# Altium PCB LPCB218R0.PcbDoc (part 3 of 3)
Units mm, origin at the board's own origin, x right, y up, seen from the top; angles counter-clockwise.
Board outline 259.35 x 183.7 mm, 4 copper layers (Top Layer, Internal Plane 1, Mid-Layer 1, Bottom Layer); 193 components, 208 nets, 896 pads, 205 vias.
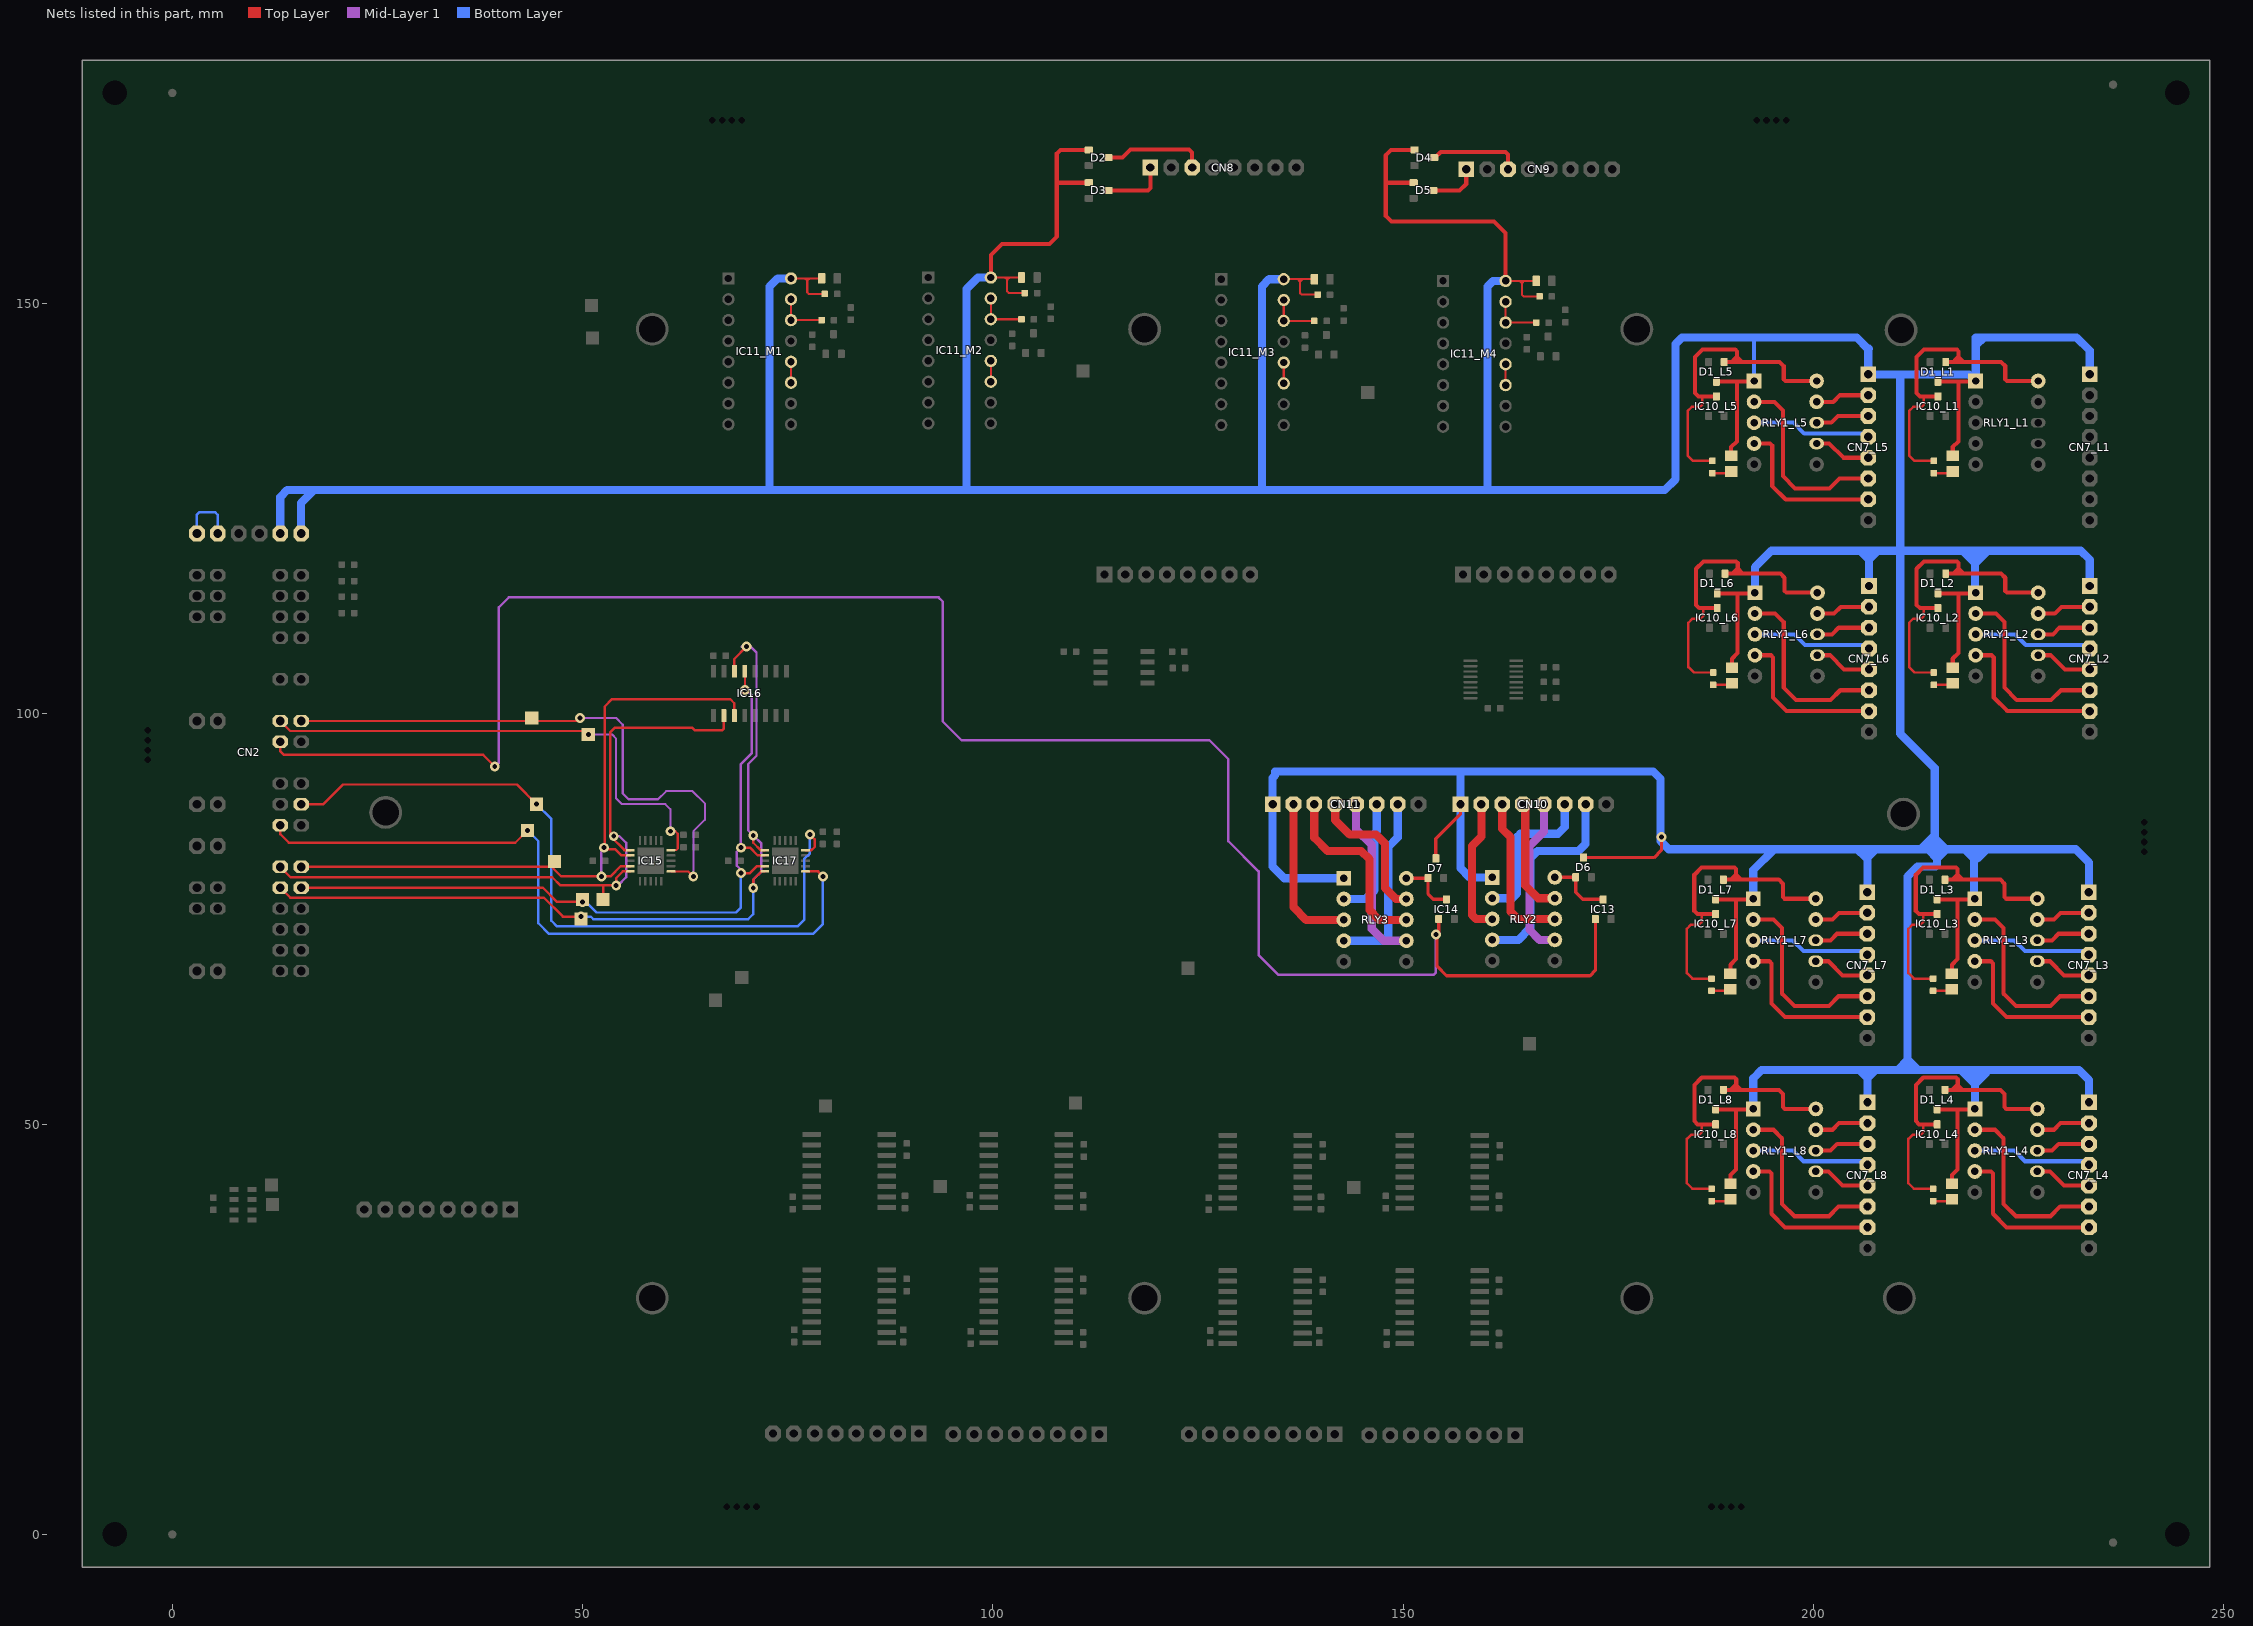
[diagram p5: the nets of this part, all layers, seen from the top]

## Via types
v1: diameter 1.2, hole 0.6, Top Layer to Bottom Layer, 181 vias
v2: diameter 0.5, hole 0.2, Top Layer to Bottom Layer, tented both sides, 16 vias
v3: diameter 1.27, hole 0.711, Top Layer to Bottom Layer, 8 vias

## Nets (pads, with @x,y where several pads share a name; then routed paths per layer and width w, separated by ;. In a path a pad name is that pad's centre, name@x,y a point inside that pad or via, vN(x,y) a via of type N, cw(c..) or ccw(c..) an arc to the next point about the centre after c; other vN are vias at no path point) (continued)
NetCN7_L2_2: CN7_L2.2 RLY1_L2.9 | length 6.6
  Top Layer w0.5: RLY1_L2.9@227.41,112.24 229.44,112.24 230.25,113.05 CN7_L2.2@233.7,113.05
NetCN7_L2_3: CN7_L2.3 RLY1_L2.8 | length 6.6
  Top Layer w0.5: RLY1_L2.8@227.41,109.7 229.2,109.7 230.01,110.51 CN7_L2.3@233.7,110.51
NetCN7_L2_4: CN7_L2.4 RLY1_L2.3 | length 14.6
  Bottom Layer w0.5: RLY1_L2.3@219.79,109.7 224.6,109.7 225.9,108.4 233.27,108.4 CN7_L2.4@233.7,107.97
NetCN7_L2_5: CN7_L2.5 RLY1_L2.7 | length 7
  Top Layer w0.5: RLY1_L2.7@227.41,107.16 228.94,107.16 230.67,105.43 CN7_L2.5@233.7,105.43
NetCN7_L2_6: CN7_L2.6 RLY1_L2.2 | length 23.5
  Top Layer w0.5: RLY1_L2.2@219.79,112.24 222.26,112.24 223.3,111.2 223.3,103.2 224.8,101.7 229,101.7 230.19,102.89 CN7_L2.6@233.7,102.89
NetCN7_L2_7: CN7_L2.7 RLY1_L2.4 | length 19.6
  Top Layer w0.5: RLY1_L2.4@219.79,107.16 221.74,107.16 222,106.9 222,102 223.65,100.35 CN7_L2.7@233.7,100.35
NetCN7_L3_2: CN7_L3.2 RLY1_L3.9 | length 6.6
  Top Layer w0.5: RLY1_L3.9@227.31,74.94 229.34,74.94 230.15,75.75 CN7_L3.2@233.6,75.75
NetCN7_L3_3: CN7_L3.3 RLY1_L3.8 | length 6.6
  Top Layer w0.5: RLY1_L3.8@227.31,72.4 229.1,72.4 229.91,73.21 CN7_L3.3@233.6,73.21
NetCN7_L3_4: CN7_L3.4 RLY1_L3.3 | length 14.6
  Bottom Layer w0.5: RLY1_L3.3@219.69,72.4 224.5,72.4 225.8,71.1 233.17,71.1 CN7_L3.4@233.6,70.67
NetCN7_L3_5: CN7_L3.5 RLY1_L3.7 | length 7
  Top Layer w0.5: RLY1_L3.7@227.31,69.86 228.84,69.86 230.57,68.13 CN7_L3.5@233.6,68.13
NetCN7_L3_6: CN7_L3.6 RLY1_L3.2 | length 23.5
  Top Layer w0.5: RLY1_L3.2@219.69,74.94 222.16,74.94 223.2,73.9 223.2,65.9 224.7,64.4 228.9,64.4 230.09,65.59 CN7_L3.6@233.6,65.59
NetCN7_L3_7: CN7_L3.7 RLY1_L3.4 | length 19.6
  Top Layer w0.5: RLY1_L3.4@219.69,69.86 221.64,69.86 221.9,69.6 221.9,64.7 223.55,63.05 CN7_L3.7@233.6,63.05
NetCN7_L4_2: CN7_L4.2 RLY1_L4.9 | length 6.6
  Top Layer w0.5: RLY1_L4.9@227.32,49.32 229.35,49.32 230.16,50.13 CN7_L4.2@233.61,50.13
NetCN7_L4_3: CN7_L4.3 RLY1_L4.8 | length 6.6
  Top Layer w0.5: RLY1_L4.8@227.32,46.78 229.11,46.78 229.92,47.59 CN7_L4.3@233.61,47.59
NetCN7_L4_4: CN7_L4.4 RLY1_L4.3 | length 14.6
  Bottom Layer w0.5: RLY1_L4.3@219.7,46.78 224.51,46.78 225.81,45.48 233.18,45.48 CN7_L4.4@233.61,45.05
NetCN7_L4_5: CN7_L4.5 RLY1_L4.7 | length 7
  Top Layer w0.5: RLY1_L4.7@227.32,44.24 228.85,44.24 230.58,42.51 CN7_L4.5@233.61,42.51
NetCN7_L4_6: CN7_L4.6 RLY1_L4.2 | length 23.5
  Top Layer w0.5: RLY1_L4.2@219.7,49.32 222.17,49.32 223.21,48.28 223.21,40.28 224.71,38.78 228.91,38.78 230.1,39.97 CN7_L4.6@233.61,39.97
NetCN7_L4_7: CN7_L4.7 RLY1_L4.4 | length 19.6
  Top Layer w0.5: RLY1_L4.4@219.7,44.24 221.65,44.24 221.91,43.98 221.91,39.08 223.56,37.43 CN7_L4.7@233.61,37.43
NetCN7_L5_2: CN7_L5.2 RLY1_L5.9 | length 6.6
  Top Layer w0.5: RLY1_L5.9@200.41,138.04 202.44,138.04 203.25,138.85 CN7_L5.2@206.7,138.85
NetCN7_L5_3: CN7_L5.3 RLY1_L5.8 | length 6.6
  Top Layer w0.5: RLY1_L5.8@200.41,135.5 202.2,135.5 203.01,136.31 CN7_L5.3@206.7,136.31
NetCN7_L5_4: CN7_L5.4 RLY1_L5.3 | length 14.6
  Bottom Layer w0.5: RLY1_L5.3@192.79,135.5 197.6,135.5 198.9,134.2 206.27,134.2 CN7_L5.4@206.7,133.77
NetCN7_L5_5: CN7_L5.5 RLY1_L5.7 | length 7
  Top Layer w0.5: RLY1_L5.7@200.41,132.96 201.94,132.96 203.67,131.23 CN7_L5.5@206.7,131.23
NetCN7_L5_6: CN7_L5.6 RLY1_L5.2 | length 23.5
  Top Layer w0.5: RLY1_L5.2@192.79,138.04 195.26,138.04 196.3,137 196.3,129 197.8,127.5 202,127.5 203.19,128.69 CN7_L5.6@206.7,128.69
NetCN7_L5_7: CN7_L5.7 RLY1_L5.4 | length 19.6
  Top Layer w0.5: RLY1_L5.4@192.79,132.96 194.74,132.96 195,132.7 195,127.8 196.65,126.15 CN7_L5.7@206.7,126.15
NetCN7_L6_2: CN7_L6.2 RLY1_L6.9 | length 6.6
  Top Layer w0.5: RLY1_L6.9@200.51,112.24 202.54,112.24 203.35,113.05 CN7_L6.2@206.8,113.05
NetCN7_L6_3: CN7_L6.3 RLY1_L6.8 | length 6.6
  Top Layer w0.5: RLY1_L6.8@200.51,109.7 202.3,109.7 203.11,110.51 CN7_L6.3@206.8,110.51
NetCN7_L6_4: CN7_L6.4 RLY1_L6.3 | length 14.6
  Bottom Layer w0.5: RLY1_L6.3@192.89,109.7 197.7,109.7 199,108.4 206.37,108.4 CN7_L6.4@206.8,107.97
NetCN7_L6_5: CN7_L6.5 RLY1_L6.7 | length 7
  Top Layer w0.5: RLY1_L6.7@200.51,107.16 202.04,107.16 203.77,105.43 CN7_L6.5@206.8,105.43
NetCN7_L6_6: CN7_L6.6 RLY1_L6.2 | length 23.5
  Top Layer w0.5: RLY1_L6.2@192.89,112.24 195.36,112.24 196.4,111.2 196.4,103.2 197.9,101.7 202.1,101.7 203.29,102.89 CN7_L6.6@206.8,102.89
NetCN7_L6_7: CN7_L6.7 RLY1_L6.4 | length 19.6
  Top Layer w0.5: RLY1_L6.4@192.89,107.16 194.84,107.16 195.1,106.9 195.1,102 196.75,100.35 CN7_L6.7@206.8,100.35
NetCN7_L7_2: CN7_L7.2 RLY1_L7.9 | length 6.6
  Top Layer w0.5: RLY1_L7.9@200.31,74.94 202.34,74.94 203.15,75.75 CN7_L7.2@206.6,75.75
NetCN7_L7_3: CN7_L7.3 RLY1_L7.8 | length 6.6
  Top Layer w0.5: RLY1_L7.8@200.31,72.4 202.1,72.4 202.91,73.21 CN7_L7.3@206.6,73.21
NetCN7_L7_4: CN7_L7.4 RLY1_L7.3 | length 14.6
  Bottom Layer w0.5: RLY1_L7.3@192.69,72.4 197.5,72.4 198.8,71.1 206.17,71.1 CN7_L7.4@206.6,70.67
NetCN7_L7_5: CN7_L7.5 RLY1_L7.7 | length 7
  Top Layer w0.5: RLY1_L7.7@200.31,69.86 201.84,69.86 203.57,68.13 CN7_L7.5@206.6,68.13
NetCN7_L7_6: CN7_L7.6 RLY1_L7.2 | length 23.5
  Top Layer w0.5: RLY1_L7.2@192.69,74.94 195.16,74.94 196.2,73.9 196.2,65.9 197.7,64.4 201.9,64.4 203.09,65.59 CN7_L7.6@206.6,65.59
NetCN7_L7_7: CN7_L7.7 RLY1_L7.4 | length 19.6
  Top Layer w0.5: RLY1_L7.4@192.69,69.86 194.64,69.86 194.9,69.6 194.9,64.7 196.55,63.05 CN7_L7.7@206.6,63.05
NetCN7_L8_2: CN7_L8.2 RLY1_L8.9 | length 6.6
  Top Layer w0.5: RLY1_L8.9@200.32,49.32 202.35,49.32 203.16,50.13 CN7_L8.2@206.61,50.13
NetCN7_L8_3: CN7_L8.3 RLY1_L8.8 | length 6.6
  Top Layer w0.5: RLY1_L8.8@200.32,46.78 202.11,46.78 202.92,47.59 CN7_L8.3@206.61,47.59
NetCN7_L8_4: CN7_L8.4 RLY1_L8.3 | length 14.6
  Bottom Layer w0.5: RLY1_L8.3@192.7,46.78 197.51,46.78 198.81,45.48 206.18,45.48 CN7_L8.4@206.61,45.05
NetCN7_L8_5: CN7_L8.5 RLY1_L8.7 | length 7
  Top Layer w0.5: RLY1_L8.7@200.32,44.24 201.85,44.24 203.58,42.51 CN7_L8.5@206.61,42.51
NetCN7_L8_6: CN7_L8.6 RLY1_L8.2 | length 23.5
  Top Layer w0.5: RLY1_L8.2@192.7,49.32 195.17,49.32 196.21,48.28 196.21,40.28 197.71,38.78 201.91,38.78 203.1,39.97 CN7_L8.6@206.61,39.97
NetCN7_L8_7: CN7_L8.7 RLY1_L8.4 | length 19.6
  Top Layer w0.5: RLY1_L8.4@192.7,44.24 194.65,44.24 194.91,43.98 194.91,39.08 196.56,37.43 CN7_L8.7@206.61,37.43
NetCN8_1: CN8.1 D3.3 | length 7.7
  Top Layer w0.5: D3.3@114.1,163.8 118.9,163.8 119.21,164.11 CN8.1@119.21,166.6
NetCN8_3: CN8.3 D2.3 | length 12.6
  Top Layer w0.5: D2.3@114.1,167.8 115.8,167.8 116.8,168.8 123.9,168.8 124.29,168.41 CN8.3@124.29,166.6
NetCN9_1: CN9.1 D5.3 | length 6.1
  Top Layer w0.5: D5.3@153.7,163.8 156.9,163.8 157.71,164.61 CN9.1@157.71,166.4
NetCN9_3: CN9.3 D4.3 | length 11.1
  Top Layer w0.5: D4.3@153.9,167.8 154.6,168.5 162.5,168.5 162.79,168.21 CN9.3@162.79,166.4
NetCN10_2: CN10.2 RLY2.3 | length 16.7
  Top Layer w1: CN10.2@159.55,89 159.55,85.05 158.4,83.9 158.4,75.5 158.9,75 RLY2.3@160.89,75
NetCN10_3: CN10.3 RLY2.8 | length 19.3
  Top Layer w1: CN10.3@162.09,89 162.09,86.01 163.1,85 163.1,75.9 164,75 RLY2.8@168.51,75
NetCN10_4: CN10.4 RLY2.9 | length 14.3
  Top Layer w1: CN10.4@164.63,89 164.9,88.73 164.9,79.1 166.46,77.54 RLY2.9@168.51,77.54
NetCN10_5: CN10.5 RLY2.7 | length 19.7
  Mid-Layer 1 w1: CN10.5@167.17,89 167.17,85.67 165.4,83.9 165.4,73.7 166.64,72.46 RLY2.7@168.51,72.46
NetCN10_6: CN10.6 RLY2.2 | length 19.2
  Bottom Layer w1: RLY2.2@160.89,77.54 163.34,77.54 163.9,78.1 163.9,85 164.3,85.4 168.9,85.4 169.71,86.21 CN10.6@169.71,89
NetCN10_7: CN10.7 RLY2.4 | length 26
  Bottom Layer w1: RLY2.4@160.89,72.46 164.06,72.46 165.5,73.9 165.5,82.4 166.4,83.3 171.4,83.3 172.25,84.15 CN10.7@172.25,89
NetCN11_2: CN11.2 RLY3.3 | length 19.3
  Top Layer w1: CN11.2@136.65,89 136.65,76.45 138.2,74.9 RLY3.3@142.79,74.9
NetCN11_3: CN11.3 RLY3.8 | length 23.1
  Top Layer w1: CN11.3@139.19,89 139.19,84.91 140.8,83.3 144.9,83.3 145.9,82.3 145.9,76.1 147.1,74.9 RLY3.8@150.41,74.9
NetCN11_4: CN11.4 RLY3.9 | length 17.8
  Top Layer w1: CN11.4@141.73,89 141.73,87.07 143.5,85.3 146.7,85.3 147.8,84.2 147.8,78.8 149.16,77.44 RLY3.9@150.41,77.44
NetCN11_5: CN11.5 RLY3.7 | length 20.8
  Mid-Layer 1 w1: CN11.5@144.27,89 144.27,85.93 146.2,84 146.2,73.8 147.64,72.36 RLY3.7@150.41,72.36
NetCN11_6: CN11.6 RLY3.2 | length 14.8
  Bottom Layer w1: RLY3.2@142.79,77.44 145.44,77.44 146.5,78.5 146.5,85.4 146.81,85.71 CN11.6@146.81,89
NetCN11_7: CN11.7 RLY3.4 | length 22.2
  Bottom Layer w1: RLY3.4@142.79,72.36 147.56,72.36 148.2,73 148.2,83.8 149.35,84.95 CN11.7@149.35,89
NetD1_L1_1: D1_L1.1 IC10_L1.3 R17_L1.1 RLY1_L1.10 | length 40.7
  Top Layer w0.3: 213.49,138.7 213.49,137.72 213.19,137.42 212.19,137.42 211.69,136.92 211.69,131.52 212.36,130.85 R17_L1.1@214.7,130.85
  Top Layer w0.5: IC10_L1.3@215.2,138.7 213,138.7 212.6,139.1 212.6,143.5 213.5,144.4 217.5,144.4 217.7,144.2 217.7,143.55 ; D1_L1.1@216.15,142.9 217.2,142.9 ; RLY1_L1.10@227.41,140.58 223.62,140.58 223.4,140.8 223.4,142.4 222.9,142.9 218.3,142.9 ; 217.2,142.9 217.2,143.05 217.7,143.55 ; 217.2,142.9 217.7,142.9 ; 217.7,142.9 217.7,143.5 ; 217.7,142.9 218.3,142.9 ; 217.7,143.5 218.3,142.9 ; 217.7,143.5 217.7,143.55
NetD1_L2_1: D1_L2.1 IC10_L2.3 R17_L2.1 RLY1_L2.10 | length 40.7
  Top Layer w0.3: 213.49,112.9 213.49,111.92 213.19,111.62 212.19,111.62 211.69,111.12 211.69,105.72 212.36,105.05 R17_L2.1@214.7,105.05
  Top Layer w0.5: IC10_L2.3@215.2,112.9 213,112.9 212.6,113.3 212.6,117.7 213.5,118.6 217.5,118.6 217.7,118.4 217.7,117.75 ; D1_L2.1@216.15,117.1 217.2,117.1 ; RLY1_L2.10@227.41,114.78 223.62,114.78 223.4,115 223.4,116.6 222.9,117.1 218.3,117.1 ; 217.2,117.1 217.2,117.25 217.7,117.75 ; 217.2,117.1 217.7,117.1 ; 217.7,117.1 217.7,117.7 ; 217.7,117.1 218.3,117.1 ; 217.7,117.7 217.7,117.75 ; 217.7,117.7 218.3,117.1
NetD1_L3_1: D1_L3.1 IC10_L3.3 R17_L3.1 RLY1_L3.10 | length 40.7
  Top Layer w0.3: 213.39,75.6 213.39,74.62 213.09,74.32 212.09,74.32 211.59,73.82 211.59,68.42 212.26,67.75 R17_L3.1@214.6,67.75
  Top Layer w0.5: IC10_L3.3@215.1,75.6 212.9,75.6 212.5,76 212.5,80.4 213.4,81.3 217.4,81.3 217.6,81.1 217.6,80.45 ; D1_L3.1@216.05,79.8 217.1,79.8 ; RLY1_L3.10@227.31,77.48 223.52,77.48 223.3,77.7 223.3,79.3 222.8,79.8 218.2,79.8 ; 217.1,79.8 217.1,79.95 217.6,80.45 ; 217.1,79.8 217.6,79.8 ; 217.6,79.8 217.6,80.4 ; 217.6,79.8 218.2,79.8 ; 217.6,80.4 217.6,80.45 ; 217.6,80.4 218.2,79.8
NetD1_L4_1: D1_L4.1 IC10_L4.3 R17_L4.1 RLY1_L4.10 | length 40.7
  Top Layer w0.3: 213.4,49.98 213.4,49 213.1,48.7 212.1,48.7 211.6,48.2 211.6,42.8 212.27,42.13 R17_L4.1@214.61,42.13
  Top Layer w0.5: IC10_L4.3@215.11,49.98 213.4,49.98 212.91,49.98 212.51,50.38 212.51,54.78 213.41,55.68 217.41,55.68 217.61,55.48 217.61,54.83 ; D1_L4.1@216.06,54.18 217.11,54.18 ; RLY1_L4.10@227.32,51.86 223.53,51.86 223.31,52.08 223.31,53.68 222.81,54.18 218.21,54.18 ; 217.11,54.18 217.11,54.33 217.61,54.83 ; 217.11,54.18 217.61,54.18 ; 217.61,54.18 217.61,54.78 ; 217.61,54.18 218.21,54.18 ; 217.61,54.78 217.61,54.83 ; 217.61,54.78 218.21,54.18
NetD1_L5_1: D1_L5.1 IC10_L5.3 R17_L5.1 RLY1_L5.10 | length 40.7
  Top Layer w0.3: 186.49,138.7 186.49,137.72 186.19,137.42 185.19,137.42 184.69,136.92 184.69,131.52 185.36,130.85 R17_L5.1@187.7,130.85
  Top Layer w0.5: IC10_L5.3@188.2,138.7 186,138.7 185.6,139.1 185.6,143.5 186.5,144.4 190.5,144.4 190.7,144.2 190.7,143.55 ; D1_L5.1@189.15,142.9 190.2,142.9 ; RLY1_L5.10@200.41,140.58 196.62,140.58 196.4,140.8 196.4,142.4 195.9,142.9 191.3,142.9 ; 190.2,142.9 190.2,143.05 190.7,143.55 ; 190.2,142.9 190.7,142.9 ; 190.7,142.9 190.7,143.5 ; 190.7,142.9 191.3,142.9 ; 190.7,143.5 190.7,143.55 ; 190.7,143.5 191.3,142.9
NetD1_L6_1: D1_L6.1 IC10_L6.3 R17_L6.1 RLY1_L6.10 | length 40.7
  Top Layer w0.3: 186.59,112.9 186.59,111.92 186.29,111.62 185.29,111.62 184.79,111.12 184.79,105.72 185.46,105.05 R17_L6.1@187.8,105.05
  Top Layer w0.5: IC10_L6.3@188.3,112.9 186.1,112.9 185.7,113.3 185.7,117.7 186.6,118.6 190.6,118.6 190.8,118.4 190.8,117.75 ; D1_L6.1@189.25,117.1 190.3,117.1 ; RLY1_L6.10@200.51,114.78 196.72,114.78 196.5,115 196.5,116.6 196,117.1 191.4,117.1 ; 190.3,117.1 190.3,117.25 190.8,117.75 ; 190.3,117.1 190.8,117.1 ; 190.8,117.1 190.8,117.7 ; 190.8,117.1 191.4,117.1 ; 190.8,117.7 190.8,117.75 ; 190.8,117.7 191.4,117.1
NetD1_L7_1: D1_L7.1 IC10_L7.3 R17_L7.1 RLY1_L7.10 | length 40.7
  Top Layer w0.3: 186.39,75.6 186.39,74.62 186.09,74.32 185.09,74.32 184.59,73.82 184.59,68.42 185.26,67.75 R17_L7.1@187.6,67.75
  Top Layer w0.5: IC10_L7.3@188.1,75.6 185.9,75.6 185.5,76 185.5,80.4 186.4,81.3 190.4,81.3 190.6,81.1 190.6,80.45 ; D1_L7.1@189.05,79.8 190.1,79.8 ; RLY1_L7.10@200.31,77.48 196.52,77.48 196.3,77.7 196.3,79.3 195.8,79.8 191.2,79.8 ; 190.1,79.8 190.1,79.95 190.6,80.45 ; 190.1,79.8 190.6,79.8 ; 190.6,79.8 190.6,80.4 ; 190.6,79.8 191.2,79.8 ; 190.6,80.4 190.6,80.45 ; 190.6,80.4 191.2,79.8
NetD1_L8_1: D1_L8.1 IC10_L8.3 R17_L8.1 RLY1_L8.10 | length 40.7
  Top Layer w0.3: 186.4,49.98 186.4,49 186.1,48.7 185.1,48.7 184.6,48.2 184.6,42.8 185.27,42.13 R17_L8.1@187.61,42.13
  Top Layer w0.5: IC10_L8.3@188.11,49.98 185.91,49.98 185.51,50.38 185.51,54.78 186.41,55.68 190.41,55.68 190.61,55.48 190.61,54.83 ; D1_L8.1@189.06,54.18 190.11,54.18 ; RLY1_L8.10@200.32,51.86 196.53,51.86 196.31,52.08 196.31,53.68 195.81,54.18 191.21,54.18 ; 190.11,54.18 190.11,54.33 190.61,54.83 ; 190.11,54.18 190.61,54.18 ; 190.61,54.18 190.61,54.78 ; 190.61,54.18 191.21,54.18 ; 190.61,54.78 190.61,54.83 ; 190.61,54.78 191.21,54.18
NetD6_1: D6.1 IC13.3 RLY2.10 | length 8.1
  Top Layer w0.4: RLY2.10@168.51,80.08 171.03,80.08 D6.1@171.05,80.1 171.05,78.25 171.9,77.4 IC13.3@174.4,77.4
NetD7_1: D7.1 IC14.3 RLY3.10 | length 7.1
  Top Layer w0.4: RLY3.10@150.41,79.98 153.03,79.98 D7.1@153.05,80 153.05,78.05 153.7,77.4 IC14.3@155.3,77.4
NetIC11_M1_11: IC11_M1.11 IC11_M1.12 | length 2.5
  Top Layer w0.254: IC11_M1.11@75.4,140.38 IC11_M1.12@75.4,142.92
NetIC11_M1_14: IC11_M1.14 IC11_M1.15 R13_M1.2 | length 6.3
  Top Layer w0.254: IC11_M1.15@75.4,150.54 IC11_M1.14@75.4,148 79.13,148 R13_M1.2@79.14,147.99
NetIC11_M2_11: IC11_M2.11 IC11_M2.12 | length 2.5
  Top Layer w0.254: IC11_M2.11@99.76,140.49 IC11_M2.12@99.76,143.03
NetIC11_M2_14: IC11_M2.14 IC11_M2.15 R13_M2.2 | length 6.3
  Top Layer w0.254: IC11_M2.15@99.76,150.65 IC11_M2.14@99.76,148.11 103.49,148.11 R13_M2.2@103.5,148.1
NetIC11_M3_11: IC11_M3.11 IC11_M3.12 | length 2.5
  Top Layer w0.254: IC11_M3.11@135.46,140.29 IC11_M3.12@135.46,142.83
NetIC11_M3_14: IC11_M3.14 IC11_M3.15 R13_M3.2 | length 6.3
  Top Layer w0.254: IC11_M3.15@135.46,150.45 IC11_M3.14@135.46,147.91 139.19,147.91 R13_M3.2@139.2,147.9
NetIC11_M4_11: IC11_M4.11 IC11_M4.12 | length 2.5
  Top Layer w0.254: IC11_M4.11@162.5,140.08 IC11_M4.12@162.5,142.62
NetIC11_M4_14: IC11_M4.14 IC11_M4.15 R13_M4.2 | length 6.3
  Top Layer w0.254: IC11_M4.15@162.5,150.24 IC11_M4.14@162.5,147.7 166.23,147.7 R13_M4.2@166.24,147.69
NetIC20_L1_K: IC20_L1.K R17_L1.2 | length 2.1
  Top Layer w0.3: R17_L1.2@214.7,129.35 IC20_L1.K@216.8,129.35
NetIC20_L2_K: IC20_L2.K R17_L2.2 | length 2.1
  Top Layer w0.3: R17_L2.2@214.7,103.55 IC20_L2.K@216.8,103.55
NetIC20_L3_K: IC20_L3.K R17_L3.2 | length 2.1
  Top Layer w0.3: R17_L3.2@214.6,66.25 IC20_L3.K@216.7,66.25
NetIC20_L4_K: IC20_L4.K R17_L4.2 | length 2.4
  Top Layer w0.3: R17_L4.2@214.61,40.63 216.71,40.63 IC20_L4.K@216.91,40.83
NetIC20_L5_K: IC20_L5.K R17_L5.2 | length 2.1
  Top Layer w0.3: R17_L5.2@187.7,129.35 IC20_L5.K@189.8,129.35
NetIC20_L6_K: IC20_L6.K R17_L6.2 | length 2.1
  Top Layer w0.3: R17_L6.2@187.8,103.55 IC20_L6.K@189.9,103.55
NetIC20_L7_K: IC20_L7.K R17_L7.2 | length 2.1
  Top Layer w0.3: R17_L7.2@187.6,66.25 IC20_L7.K@189.7,66.25
NetIC20_L8_K: IC20_L8.K R17_L8.2 | length 2.1
  Top Layer w0.3: R17_L8.2@187.61,40.63 IC20_L8.K@189.71,40.63
P5VA: CN2.P5V1 CN2.P5V2 | length 7.4
  Bottom Layer w0.3: CN2.P5V1@3,122 3,124.3 3.3,124.6 5.2,124.6 5.54,124.26 CN2.P5V2@5.54,122
P24VA: C22_M1.1 C22_M2.1 C22_M3.1 C22_M4.1 C23_M1.1 C23_M2.1 C23_M3.1 C23_M4.1 CN2.P24V1 CN2.P24V2 CN7_L1.1 CN7_L2.1 CN7_L3.1 CN7_L4.1 CN7_L5.1 CN7_L6.1 CN7_L7.1 CN7_L8.1 CN10.1 CN11.1 D1_L1.3 D1_L2.3 D1_L3.3 D1_L4.3 D1_L5.3 D1_L6.3 D1_L7.3 D1_L8.3 D2.1 D3.1 D4.1 D5.1 D6.3 D7.3 IC11_M1.16 IC11_M2.16 IC11_M3.16 IC11_M4.16 IC20_L1.A IC20_L2.A IC20_L3.A IC20_L4.A IC20_L5.A IC20_L6.A IC20_L7.A IC20_L8.A RLY1_L1.1 RLY1_L2.1 RLY1_L3.1 RLY1_L4.1 RLY1_L5.1 RLY1_L6.1 RLY1_L7.1 RLY1_L8.1 RLY2.1 RLY3.1 | length 1015.6
  Top Layer w0.254: IC11_M1.16@75.4,153.08 77.09,153.08 ; C23_M1.1@79.14,153.09 79.13,153.08 77.69,153.08 ; C22_M1.1@79.54,151.19 77.59,151.19 77.39,151.39 77.39,152.79 ; IC11_M2.16@99.76,153.19 101.45,153.19 ; C23_M2.1@103.5,153.2 103.49,153.19 102.05,153.19 ; C22_M2.1@103.9,151.3 101.95,151.3 101.75,151.5 101.75,152.9 ; IC11_M3.16@135.46,152.99 137.15,152.99 ; C23_M3.1@139.2,153 139.19,152.99 137.75,152.99 ; C22_M3.1@139.6,151.1 137.65,151.1 137.45,151.3 137.45,152.7 ; IC11_M4.16@162.5,152.78 164.19,152.78 ; C23_M4.1@166.24,152.79 166.23,152.78 164.79,152.78 ; C22_M4.1@166.64,150.89 164.69,150.89 164.49,151.09 164.49,152.49 ; 77.09,153.08 77.38,152.79 77.39,152.79 ; 77.09,153.08 77.39,153.08 ; 77.39,152.79 77.39,153.08 ; 77.39,152.79 77.4,152.79 77.69,153.08 ; 77.39,153.08 77.69,153.08 ; 101.45,153.19 101.75,153.19 ; 101.45,153.19 101.74,152.9 101.75,152.9 ; 101.75,152.9 101.75,153.19 ; 101.75,152.9 101.76,152.9 102.05,153.19 ; 101.75,153.19 102.05,153.19 ; 137.15,152.99 137.44,152.7 137.45,152.7 ; 137.15,152.99 137.45,152.99 ; 137.45,152.7 137.46,152.7 137.75,152.99 ; 137.45,152.7 137.45,152.99 ; 137.45,152.99 137.75,152.99 ; 164.19,152.78 164.48,152.49 164.49,152.49 ; 164.19,152.78 164.49,152.78 ; 164.49,152.49 164.5,152.49 164.79,152.78 ; 164.49,152.49 164.49,152.78 ; 164.49,152.78 164.79,152.78
  Top Layer w0.4: D7.3@154,82.4 154,84.8 157.01,87.81 CN10.1@157.01,89 ; D6.3@172,82.5 180.6,82.5 181.5,83.4 v1(181.5,85)
  Top Layer w0.5: IC11_M2.16@99.76,153.19 99.76,155.96 101.1,157.3 106.9,157.3 107.8,158.2 107.8,164.7 ; D3.1@111.7,164.75 107.85,164.75 107.8,164.7 ; D2.1@111.7,168.75 108.25,168.75 107.8,168.3 107.8,164.7 ; D5.1@151.3,164.75 147.95,164.75 147.9,164.8 ; D4.1@151.4,168.75 148.55,168.75 147.9,168.1 147.9,164.8 ; IC11_M4.16@162.5,152.78 162.5,158.6 161.1,160 148.6,160 147.9,160.7 147.9,164.8 ; D1_L7.3@188.1,77.4 192.61,77.4 RLY1_L7.1@192.69,77.48 ; D1_L8.3@188.11,51.78 192.62,51.78 RLY1_L8.1@192.7,51.86 ; D1_L5.3@188.2,140.5 192.71,140.5 RLY1_L5.1@192.79,140.58 ; D1_L6.3@188.3,114.7 192.81,114.7 RLY1_L6.1@192.89,114.78 ; IC20_L7.A@189.9,68.35 189.9,69.43 190.59,70.12 190.59,77.4 ; IC20_L8.A@189.91,42.73 189.91,43.81 190.6,44.5 190.6,51.78 ; IC20_L5.A@190,131.45 190,132.53 190.69,133.22 190.69,140.5 ; IC20_L6.A@190.1,105.65 190.1,106.73 190.79,107.42 190.79,114.7 ; D1_L3.3@215.1,77.4 219.61,77.4 RLY1_L3.1@219.69,77.48 ; D1_L4.3@215.11,51.78 217.6,51.78 ; D1_L2.3@215.2,114.7 219.71,114.7 RLY1_L2.1@219.79,114.78 ; D1_L1.3@215.2,140.5 219.71,140.5 RLY1_L1.1@219.79,140.58 ; IC20_L3.A@216.9,68.35 216.9,69.43 217.59,70.12 217.59,77.4 ; IC20_L4.A@216.91,42.73 216.91,43.81 217.6,44.5 217.6,51.78 ; IC20_L2.A@217,105.65 217,106.73 217.69,107.42 217.69,114.7 ; IC20_L1.A@217,131.45 217,132.53 217.69,133.22 217.69,140.5 ; RLY1_L4.1@219.7,51.86 219.62,51.78 217.6,51.78
  Bottom Layer w0.5: 192.7,145.9 192.79,145.81 RLY1_L5.1@192.79,140.58 ; 219.6,56.6 219.7,56.5
  Bottom Layer w1: CN2.P24V1@13.16,122 13.16,126.46 14,127.3 17.3,127.3 ; CN2.P24V2@15.7,122 15.7,125.7 17.3,127.3 ; IC11_M1.16@75.4,153.08 73.78,153.08 72.8,152.1 72.8,127.3 ; IC11_M2.16@99.76,153.19 98.19,153.19 96.8,151.8 96.8,127.3 ; IC11_M3.16@135.46,152.99 133.69,152.99 132.8,152.1 132.8,127.3 ; RLY3.1@142.79,79.98 135.52,79.98 134.11,81.39 CN11.1@134.11,89 134.11,92.21 134.4,92.5 134.4,93 157,93 ; RLY2.1@160.89,80.08 158.12,80.08 157,81.2 157,93 ; IC11_M4.16@162.5,152.78 160.98,152.78 160.3,152.1 160.3,127.3 ; RLY1_L7.1@192.69,77.48 192.69,80.99 195.2,83.5 ; RLY1_L8.1@192.7,51.86 192.7,55.6 193.7,56.6 205.62,56.6 ; RLY1_L6.1@192.89,114.78 192.89,117.89 194.9,119.9 205.8,119.9 ; CN7_L7.1@206.6,78.29 206.6,82.5 ; CN7_L8.1@206.61,52.67 206.61,55.61 ; CN7_L6.1@206.8,115.59 206.8,118.8 ; 206.8,144.5 206.7,144.5 ; RLY1_L3.1@219.69,77.48 219.6,77.57 219.6,82.4 ; RLY1_L4.1@219.7,51.86 219.7,54.9 ; 219.7,56.5 219.7,54.9 ; RLY1_L2.1@219.79,114.78 219.7,114.87 219.7,118.4 ; 219.8,118.4 221.3,119.9 ; 221.3,145.9 220.8,145.9 ; CN7_L3.1@233.6,78.29 233.6,81.9 232,83.5 221.1,83.5 ; CN7_L4.1@233.61,52.67 233.61,55.39 232.4,56.6 221.1,56.6 ; CN7_L2.1@233.7,115.59 233.7,118.8 232.6,119.9 221.3,119.9 ; CN7_L1.1@233.7,141.39 233.7,144.3 232.1,145.9 220.8,145.9 ; 17.3,127.3 72.8,127.3 ; 72.8,127.3 96.8,127.3 ; 96.8,127.3 132.8,127.3 ; 132.8,127.3 160.3,127.3 ; 157,93 180.5,93 181.4,92.1 181.4,84.5 182.4,83.5 195.2,83.5 ; 160.3,127.3 181.9,127.3 183.2,128.6 183.2,145.1 184,145.9 192.7,145.9 205.3,145.9 206.7,144.5 ; 195.2,83.5 205.4,83.5 ; 205.4,83.5 206.4,82.5 206.6,82.5 ; 205.4,83.5 206.7,83.5 ; 205.62,56.6 206.61,55.61 ; 205.62,56.6 206.5,56.6 ; 205.8,119.9 205.8,119.8 206.8,118.8 ; 205.8,119.9 206.7,119.9 ; 206.5,56.6 206.61,56.49 206.61,55.61 ; 206.5,56.6 207.6,56.6 ; 206.6,82.5 207.6,83.5 ; 206.6,82.5 206.6,83.4 206.7,83.5 ; 206.61,55.61 207.6,56.6 ; 206.7,83.5 207.6,83.5 ; 206.7,119.9 206.8,119.8 206.8,118.8 ; 206.7,119.9 207.9,119.9 ; 206.7,144.5 CN7_L5.1@206.7,141.39 210.6,141.39 ; 206.8,118.8 207.9,119.9 ; 207.6,56.6 210.3,56.6 ; 207.6,83.5 213.1,83.5 ; 207.9,119.9 210.6,119.9 ; 210.3,56.6 211.5,57.8 ; 210.3,56.6 211.5,56.6 ; 210.6,119.9 210.6,97.6 214.8,93.4 214.8,84.9 ; 210.6,119.9 218.2,119.9 ; 210.6,119.9 210.6,141.39 ; 210.6,141.39 218.98,141.39 RLY1_L1.1@219.79,140.58 219.8,140.59 219.8,144.9 ; 211.5,56.6 212.8,56.6 ; 211.5,56.6 211.5,57.8 ; 211.5,57.8 211.5,57.9 ; 211.5,57.9 211.5,80.2 212.7,81.4 214.9,81.4 215.1,81.6 215.1,82.4 ; 211.5,57.9 212.8,56.6 ; 212.8,56.6 218,56.6 ; 213.1,83.5 214.5,84.9 214.8,84.9 ; 213.1,83.5 214.1,83.5 ; 214.1,83.5 214.1,83.4 215.1,82.4 ; 214.1,83.5 214.8,83.5 ; 214.8,83.5 214.8,84.9 ; 214.8,83.5 215.1,83.5 ; 214.8,84.9 215.1,84.6 ; 215.1,82.4 215.1,83.5 ; 215.1,82.4 216.2,83.5 ; 215.1,83.5 215.1,84.6 ; 215.1,83.5 216.2,83.5 ; 215.1,84.6 216.2,83.5 ; 216.2,83.5 218.5,83.5 ; 218,56.6 219.7,54.9 ; 218,56.6 219.6,56.6 221.1,56.6 ; 218.2,119.9 219.7,118.4 ; 218.2,119.9 219.7,119.9 ; 218.5,83.5 219.6,82.4 ; 218.5,83.5 219.6,83.5 ; 219.6,82.4 219.6,83.5 ; 219.6,82.4 220,82.4 221.1,83.5 ; 219.6,83.5 221.1,83.5 ; 219.7,54.9 221.1,56.3 221.1,56.6 ; 219.7,118.4 219.7,119.9 ; 219.7,119.9 221.3,119.9 ; 219.8,144.9 219.8,145.9 220.8,145.9 ; 219.8,144.9 220.8,145.9
PARK_BRAKE: CN2.T2 IC13.1 IC14.1 | length 238.8
  Top Layer w0.3: CN2.T2@13.16,96.6 13.16,95.44 13.6,95 37.9,95 v1(39.3,93.6)
  Top Layer w0.4: v1(154,73.1) v1@154.15,73.25 ; IC14.1@154.35,75 154.35,73.45 v1@154.15,73.25 ; IC13.1@173.45,75 173.45,68.75 172.8,68.1 155.3,68.1 154.15,69.25 v1@154.15,73.25
  Mid-Layer 1 w0.3: v1@39.4,93.6 39.8,94 39.8,113 41,114.2 93.4,114.2 93.9,113.7 93.9,99.1 96.2,96.8 126.4,96.8 128.7,94.5 128.7,84.5 132.4,80.8 132.4,70.6 134.8,68.2 153.7,68.2 154,68.5 v1(154,73.1)
RS485_MUX14_SA0: CN2.T14 IC15.11 IC15.15 IC16.2 TP1.1 | length 85.9
  Top Layer w0.3: CN2.T14@13.16,81.36 14.42,80.1 46.3,80.1 47.3,79.1 52.5,79.1 ; TP1.1@52.5,77.4 52.5,79.1 ; v1@54.1,79 v1(54.1,79.1) ; IC15.15@55.825,80.8 54.9,80.8 54.1,80 v1(54.1,79.1) ; IC15.11@55.825,83.4 55.1,83.4 53.4,85.1 53.4,97.8 53.9,98.3 63.4,98.3 63.7,98 67,98 67.225,98.225 IC16.2@67.225,99.8 ; 52.5,79.1 v1(54.1,79.1)
  Mid-Layer 1 w0.3: v1(53.8,85.1) 54.5,85.1 55.3,84.3 55.3,80.1 54.3,79.1 v1(54.1,79.1)
RS485_MUX14_SA1: CN2.T15 IC15.12 IC15.14 IC16.3 TP2.1 | length 83.3
  Top Layer w0.3: CN2.T15@15.7,81.36 46.24,81.36 47.4,80.2 v1(52.3,80.2) 53.4,80.2 54.65,81.45 IC15.14@55.825,81.45 ; IC15.12@55.825,82.75 54.75,82.75 54,83.5 52.9,83.5 52.7,83.7 52.7,100.9 53.6,101.8 68,101.8 68.495,101.305 IC16.3@68.495,99.8
  Mid-Layer 1 w0.3: v1(52.3,80.2) 52.3,83.4 v1(52.6,83.7)
RS485_MUX58_SA0: CN2.T16 IC16.14 IC17.11 IC17.15 TP3.1 | length 104.8
  Top Layer w0.3: CN2.T16@13.16,78.82 14.38,77.6 45.3,77.6 47.6,75.3 v1(49.8,75.3) ; IC16.14@68.495,105.2 68.495,106.695 v1(70,108.2) ; v1(70.8,78.8) 70.8,79.8 71.8,80.8 IC17.15@72.225,80.8 ; v1(70.8,85.2) 70.8,84.3 71.7,83.4 IC17.11@72.225,83.4
  Mid-Layer 1 w0.3: v1(70,108.2) 69.4,108.2 69.5,108.3 70.4,108.3 71.2,107.5 71.2,94.9 70.2,93.9 70.2,85.8 v1(70.8,85.2) 71.8,84.2 71.8,80.8 70.8,79.8 v1(70.8,78.8)
  Bottom Layer w0.3: v1(49.8,75.3) 51,75.3 51.3,75 70.2,75 70.8,75.6 v1(70.8,78.8)
RS485_MUX58_SA1: CN2.T17 IC16.13 IC17.12 IC17.14 TP4.1 | length 92
  Top Layer w0.3: CN2.T17@15.7,78.82 45.18,78.82 46.9,77.1 v1(50,77.1) ; v1(69.3,80.6) 70.4,80.6 71.25,81.45 IC17.14@72.225,81.45 ; v1(69.3,83.7) 70.4,83.7 71.35,82.75 IC17.12@72.225,82.75 ; IC16.13@69.765,105.2 69.8,105.165 v1(69.8,102.9)
  Mid-Layer 1 w0.3: v1(69.3,80.6) 69.3,81 68.8,81.5 68.8,83.2 v1(69.3,83.7) 69.3,93.9 70.6,95.2 70.6,102.3 69.9,103 v1(69.8,102.9)
  Bottom Layer w0.3: v1(50,77.1) 50.4,77.1 51.7,75.8 68.7,75.8 69.3,76.4 v1(69.3,80.6)
RS485_RX14: CN2.T0 IC15.5 TP16.1 | length 62.7
  Top Layer w0.254: CN2.T0@13.16,99.14 14.4,97.9 50.3,97.9 v1(50.7,97.5) ; v1(60.7,85.7) 61.3,85.7 61.6,85.4 61.6,83.6 61.4,83.4 IC15.5@60.775,83.4
  Mid-Layer 1 w0.254: v1(50.7,97.5) 53.6,97.5 54.1,97 54.1,89.7 54.8,89 60.1,89 60.7,88.4 v1(60.7,85.7)
RS485_RX58: CN2.T9 IC17.5 TP18.1 | length 90.8
  Top Layer w0.3: CN2.T9@15.7,88.98 18.38,88.98 20.8,91.4 42,91.4 v1(44.4,89) ; IC17.5@77.175,83.4 77.9,83.4 78.3,83.8 78.3,84.7 v1(77.7,85.3)
  Bottom Layer w0.3: v1(44.4,89) 46.2,87.2 46.2,74.8 46.9,74.1 76.2,74.1 77,74.9 77,82.3 77.7,83 v1(77.7,85.3)
RS485_TX14: CN2.T1 IC15.1 TP17.1 | length 72.1
  Top Layer w0.254: CN2.T1@15.7,99.14 49.44,99.14 v1@49.9,99.6 ; IC15.1@60.775,80.8 62.9,80.8 v1(63.5,80.2)
  Mid-Layer 1 w0.254: v1(49.7,99.5) 54.1,99.5 54.9,98.7 54.9,90.3 55.6,89.6 59.2,89.6 60.2,90.6 63.4,90.6 64.9,89.1 64.9,87.1 63.5,85.7 v1(63.5,80.2)
RS485_TX58: CN2.T10 IC17.1 TP19.1 | length 88
  Top Layer w0.3: CN2.T10@13.16,86.44 13.16,85.34 14.2,84.3 41.8,84.3 v1(43.3,85.8) ; IC17.1@77.175,80.8 78.7,80.8 v1(79.3,80.2)
  Bottom Layer w0.3: v1(43.3,85.8) 44.6,84.5 44.6,74.5 45.9,73.2 78.1,73.2 79.3,74.4 v1(79.3,80.2)
pads on no net: CN1.5 CN1.6 CN1.7 CN2.A14 CN2.ID5 CN2.ID6 CN2.ID7 CN2.ID8 CN2.T21 CN2.T31 CN12.5 CN12.6 CN12.7 CN12.8 D1_L1.2 D1_L2.2 D1_L3.2 D1_L4.2 D1_L5.2 D1_L6.2 D1_L7.2 D1_L8.2 D2.2 D3.2 D4.2 D5.2 D6.2 D7.2 FID8_1.1 FID8_1_1.1 FID10_1.1 FID10_1_1.1 IC2.11 IC2.14 IC3.11 IC3.14 IC4.11 IC4.14 IC5.11 IC5.14 IC6.11 IC6.14 IC7.11 IC7.14 IC8.11 IC8.14 IC9.11 IC9.14 IC11_M1.1 IC11_M1.6 IC11_M1.7 IC11_M1.8 IC11_M1.9 IC11_M1.10 IC11_M2.1 IC11_M2.6 IC11_M2.7 IC11_M2.8 IC11_M2.9 IC11_M2.10 IC11_M3.1 IC11_M3.6 IC11_M3.7 IC11_M3.8 IC11_M3.9 IC11_M3.10 IC11_M4.1 IC11_M4.6 IC11_M4.7 IC11_M4.8 IC11_M4.9 IC11_M4.10 IC12_M1.2 IC12_M2.2 IC12_M3.2 IC12_M4.2 IC19.5 IC19.6 RLY1_L1.5 RLY1_L1.6 RLY1_L2.5 RLY1_L2.6 RLY1_L3.5 RLY1_L3.6 RLY1_L4.5 RLY1_L4.6 RLY1_L5.5 RLY1_L5.6 RLY1_L6.5 RLY1_L6.6 RLY1_L7.5 RLY1_L7.6 RLY1_L8.5 RLY1_L8.6 RLY2.5 RLY2.6 RLY3.5 RLY3.6 SN1.0 SN2.0 SN3.0 SN4.0 SN5.0 SN6.0 TOOLHOLE1_1.TOOL TOOLHOLE1_1_1.TOOL TOOLHOLE5_1.TOOL1 TOOLHOLE5_1_1.TOOL1

## Polygon pours and split planes (outlines as drawn)
DGND on Bottom Layer "Bottom Layer-No Net" (solid, remove dead copper, pour order 10): -2.9,173.1 240.1,173.1 240.3,172.9 240.1,172.7 240.1,2.9 -2.7,2.9 -3.7,3.9
AGND on Bottom Layer "Bottom Layer-No Net" (solid, remove dead copper, pour order 7): 63.7,172.5 63.7,172.695 178.6,172.6 178.6,131.9 178.4,131.7 63.7,131.8
DGND on Mid-Layer 1 "Bottom Layer-No Net" (solid, remove dead copper, pour order 11): -2.9,173.1 240.1,173.1 240.3,172.9 240.1,172.7 240.1,2.9 -2.7,2.9 -3.7,3.9
AGND on Mid-Layer 1 "Bottom Layer-No Net" (solid, remove dead copper, pour order 8): 63.7,172.5 63.7,172.695 178.6,172.6 178.6,131.9 178.4,131.7 63.7,131.8
DGND on Top Layer "Bottom Layer-No Net" (solid, remove dead copper, pour order 12): -2.9,173.1 240.1,173.1 240.3,172.9 240.1,172.7 240.1,2.9 -2.7,2.9 -3.7,3.9
AGND on Top Layer "Bottom Layer-No Net" (solid, remove dead copper, pour order 9): 63.7,172.5 63.7,172.695 178.6,172.6 178.6,131.9 178.4,131.7 63.7,131.8
DGND on Internal Plane 1 (split plane): 247.837,-3.49 -10.49,-3.49 -10.49,179.185 247.837,179.185

## Keep-outs
Keep-Out Layer:
  lines w0.5: -3,26 0.5,26 cw(c0.5,18.848) 7.652,18.848 7.652,8.625 cw(c-1,5.348) 8.252,5.348 8.252,3.348 228.748,3.348 228.748,5.348 cw(c238,5.348) 229.348,8.625 229.348,18.848 cw(c236.5,18.848) 236.5,26 240.348,26 240.348,149.695 236.5,149.695 cw(c236.5,156.848) 229.348,156.848 229.348,167.07 cw(c238,170.348) 228.748,170.348 228.748,172.348 8.252,172.348 8.252,170.348 cw(c-1,170.348) 7.652,167.07 7.652,156.848 cw(c0.5,156.848) 0.5,149.695 -3,149.695 -3,26

## Other copper
Top Layer:
  text "rLoop - Command Node, Rev 1.0" at 8.5,-1.7 h3

## Silkscreen, mask and mechanical layers (free items; w line width, h text height)
Top Overlay:
  lines w0.1: 81.2,147.4 81.7,146.9 82,146.9
  text "LINEAR POSITION 3-4" at 156.4,170.5 h2
  text "LINEAR POSITION 1-2" at 117.9,170.4 h2
  text "THERMO" at 176.2,150.8 h1.5
  text "THERMO" at 207.5,149.3 h1.5
  text "LIFT MECH 5" at 210.7,142.6 h2 r270
  text "LIFT MECH 1" at 237.7,142.6 h2 r270
  text "EXTERNAL I2C" at 112.3,121.3 h2
  text "REMOTE CHARGER I/F" at 156,121.3 h2
  text "ID1" at 23.2,117.2 h1.5
  text "LIFT MECH 6" at 210.8,116.8 h2 r270
  text "LIFT MECH 2" at 237.7,116.8 h2 r270
  text "ID2" at 23.2,115.2 h1.5
  text "ID3" at 23.2,113.2 h1.5
  text "ID4" at 23.2,111.2 h1.5
  text "TX1" at 163.1,110.7 h2 r90
  text "RX1" at 157.8,110.6 h2 r90
  text "RX2" at 160.4,110.6 h2 r90
  text "TX2" at 165.6,110.6 h2 r90
  text "PARK BRAKE" at 132.8,93.3 h2
  text "PARK BRAKE" at 155.7,93.3 h2
  text "LIFT MECH 7" at 210.6,79.5 h2 r270
  text "LIFT MECH 3" at 237.6,79.5 h2 r270
  text "LIFT MECH 8" at 210.61,53.88 h2 r270
  text "LIFT MECH 4" at 237.61,53.88 h2 r270
  text "THERMAL INTERFACE" at 22.2,34.3 h2
  text "THERMO" at 208.4,25.4 h1.5
  text "THERMO" at 176.9,25.2 h1.5
  text "HOVER ENGINE 1-4 RS485" at 81,16.4 h2
  text "HOVER ENGINE 5-8 RS485" at 131.6,16.4 h2
  text "Command Node" at 199.425,16.19 h2
  text "Rev. 1.0" at 199.325,14.39 h2
  text "S/N:" at 199.325,9.79 h2
  text "5V" at 91.2,6.9 h1 r90
  text "5V" at 113.19,6.8 h1 r90
  text "5V" at 141.9,6.8 h1 r90
  text "5V" at 73.1,6.7 h1 r90
  text "5V" at 163.89,6.7 h1 r90
  text "5V" at 95.09,6.6 h1 r90
  text "5V" at 123.8,6.6 h1 r90
  text "5V" at 145.79,6.5 h1 r90
  text "GND" at 81,6.1 h1 r90
  text "GND" at 83.5,6.1 h1 r90
  text "GND" at 103,6 h1 r90
  text "GND" at 105.49,6 h1 r90
  text "GND" at 131.7,6 h1 r90
  text "GND" at 134.2,6 h1 r90
  text "GND" at 153.7,5.9 h1 r90
  text "GND" at 156.19,5.9 h1 r90
  text "RS485 B" at 75.9,4.6 h1 r90
  text "RS485 A" at 78.3,4.6 h1 r90
  text "RS485 B" at 86.1,4.6 h1 r90
  text "RS485 A" at 88.7,4.6 h1 r90
  text "RS485 B" at 97.89,4.5 h1 r90
  text "RS485 A" at 100.2,4.5 h1 r90
  text "RS485 B" at 108.09,4.5 h1 r90
  text "RS485 A" at 110.7,4.5 h1 r90
  text "RS485 B" at 126.6,4.5 h1 r90
  text "RS485 A" at 129,4.5 h1 r90
  text "RS485 B" at 136.8,4.5 h1 r90
  text "RS485 A" at 139.4,4.5 h1 r90
  text "RS485 B" at 148.59,4.4 h1 r90
  text "RS485 A" at 150.9,4.4 h1 r90
  text "RS485 B" at 158.79,4.4 h1 r90
  text "RS485 A" at 161.4,4.4 h1 r90
Mechanical 1:
  lines w0.1: -11,-4 -11,179.695 248.348,179.695 248.348,-4 -11,-4
  lines w0.127: -3,26 -3,149.695 0.5,149.695 ccw(c0.5,156.848) 7.652,156.848 7.652,167.07 ccw(c-1,170.348) 8.252,170.348 8.252,172.348 228.748,172.348 228.748,170.348 ccw(c238,170.348) 229.348,167.07 229.348,156.848 ccw(c236.5,156.848) 236.5,149.695 240.348,149.695 240.348,26 236.5,26 ccw(c236.5,18.848) 229.348,18.848 229.348,8.625 ccw(c238,5.348) 228.748,5.348 228.748,3.348 8.252,3.348 8.252,5.348 ccw(c-1,5.348) 7.652,8.625 7.652,18.848 ccw(c0.5,18.848) 0.5,26 -3,26
Mechanical 3:
  lines w2.4: -4.2,93.2 -4.2,24.8 0.5,24.8 ; -4.2,99.2 -4.2,150.8 ; -4.2,150.895 0.5,150.895 ; 0.5,24.8 cw(c0.5,18.848) 6.452,18.848 6.452,8.625 ; 0.5,150.896 ccw(c0.5,156.848) 6.452,156.848 6.452,167.27 ; 6.53,8.2 cw(c-1,5.348) 7.052,5.348 7.052,2.148 66.4,2.148 ; 6.53,167.494 ccw(c-1.005,170.349) 7.052,170.349 7.052,173.548 64.552,173.548 ; 70.652,173.548 191.852,173.548 ; 72.4,2.148 186.4,2.148 ; 192.4,2.148 229.948,2.148 229.948,5.348 cw(c238,5.348) 230.47,8.2 ; 197.852,173.548 229.948,173.548 229.948,170.348 ccw(c238,170.348) 230.47,167.495 ; 230.548,8.625 230.548,18.848 ; 230.548,156.848 230.548,167.07 ; 230.548,18.848 cw(c236.5,18.848) 236.5,24.8 ; 230.548,156.848 ccw(c236.5,156.848) 236.5,150.896 ; 236.5,24.8 241.548,24.8 ; 236.5,150.895 241.548,150.895 241.548,88.495 ; 241.548,24.895 241.548,82.495

## Text inside footprints (layer, text, board x,y; h text height)
LBL1: Top Overlay "STATIC SENSITIVE" at 190.326,156.204 h2
LBL2: Top Overlay "rloop.org" at 187.55,10.5 h1